# Altium PCB Solears_v3.PcbDoc
Units mm, origin at the board's own origin, x right, y up, seen from the top; angles counter-clockwise.
Board outline 51.82 x 94.11 mm, 4 copper layers (Top Layer, Layer 1, Layer 2, Bottom Layer), stack 0.603 mm thick; 55 components, 54 nets, 225 pads, 70 vias.
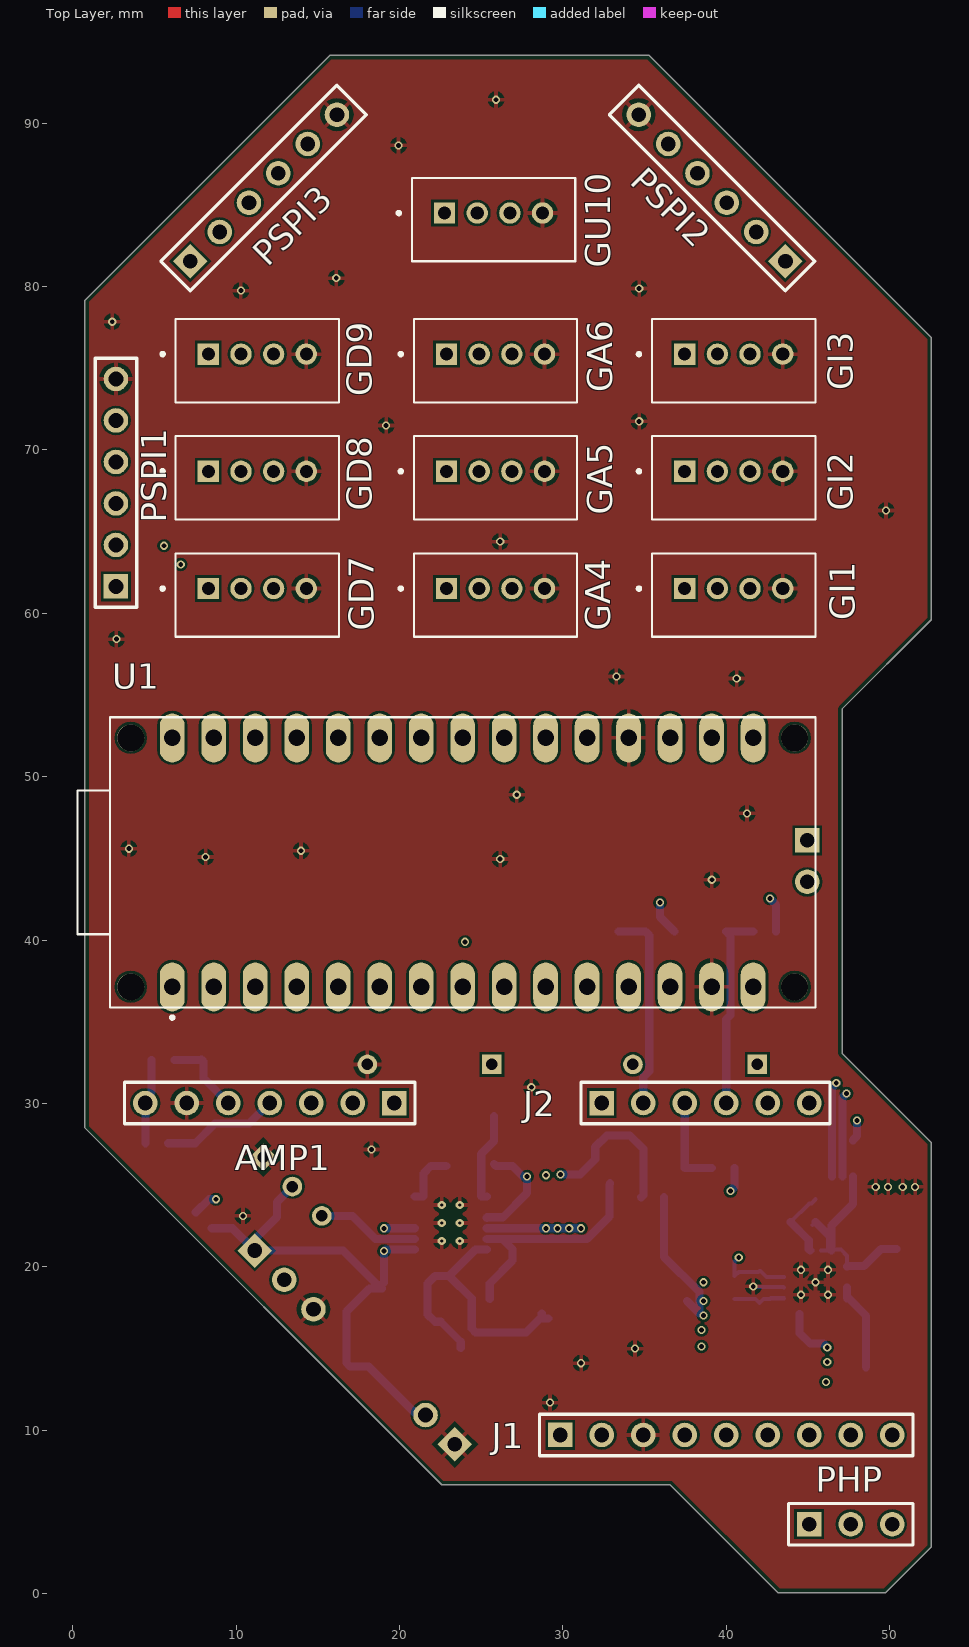
[diagram p0: Top Layer view]
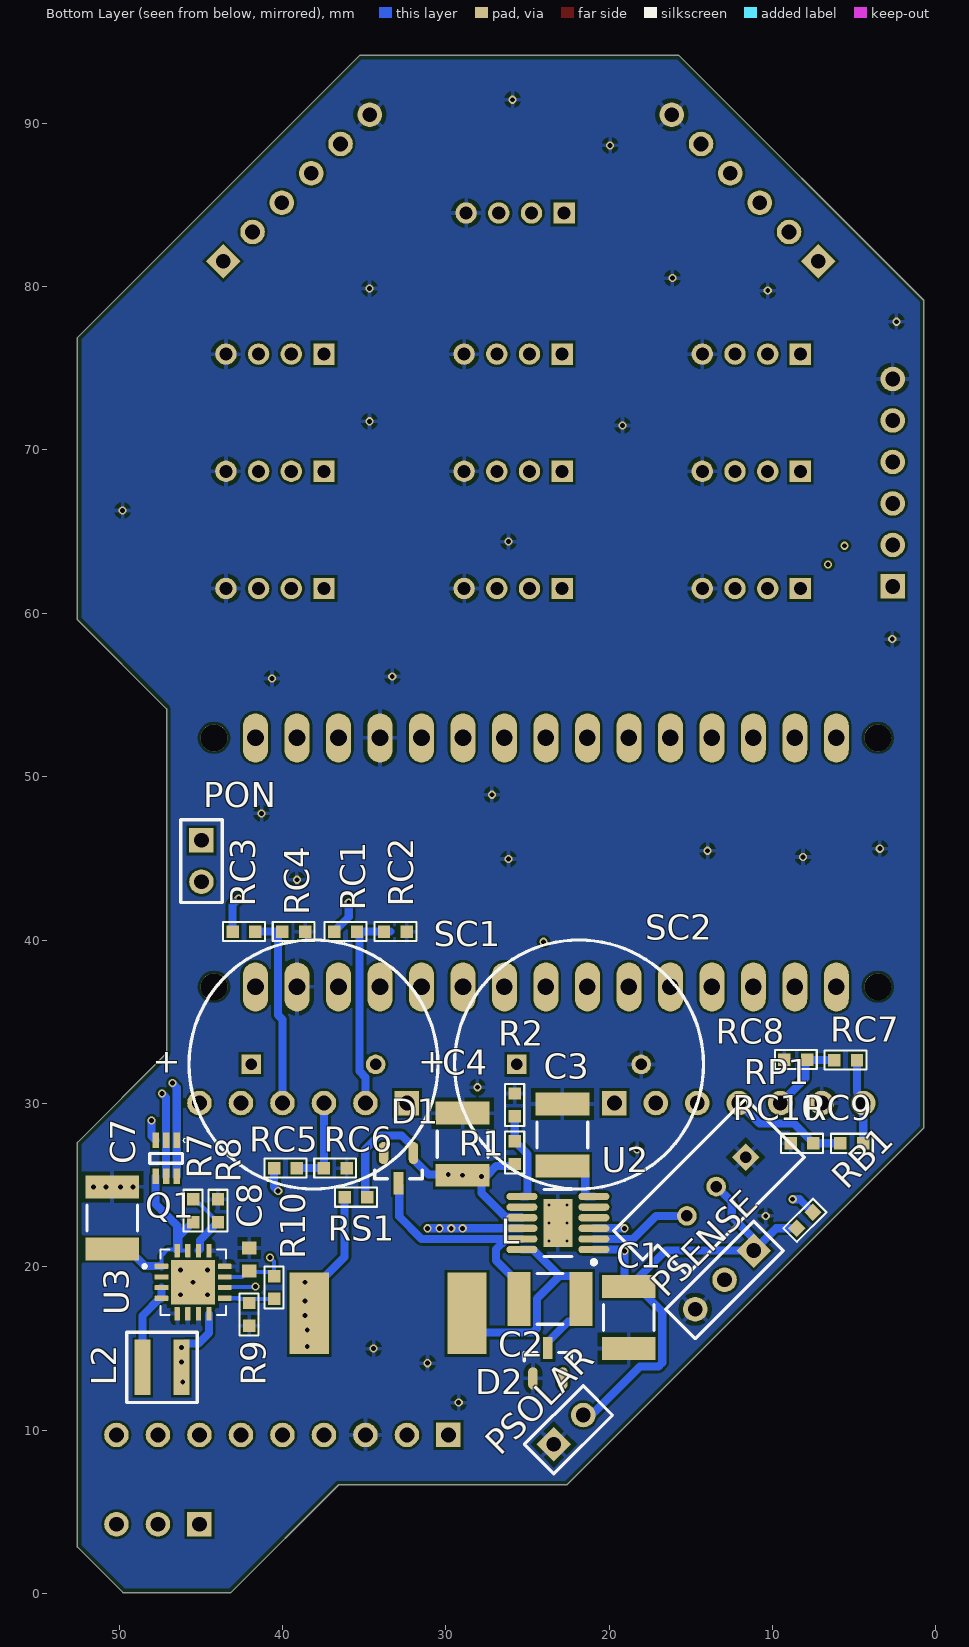
[diagram p1: Bottom Layer view, seen from below]
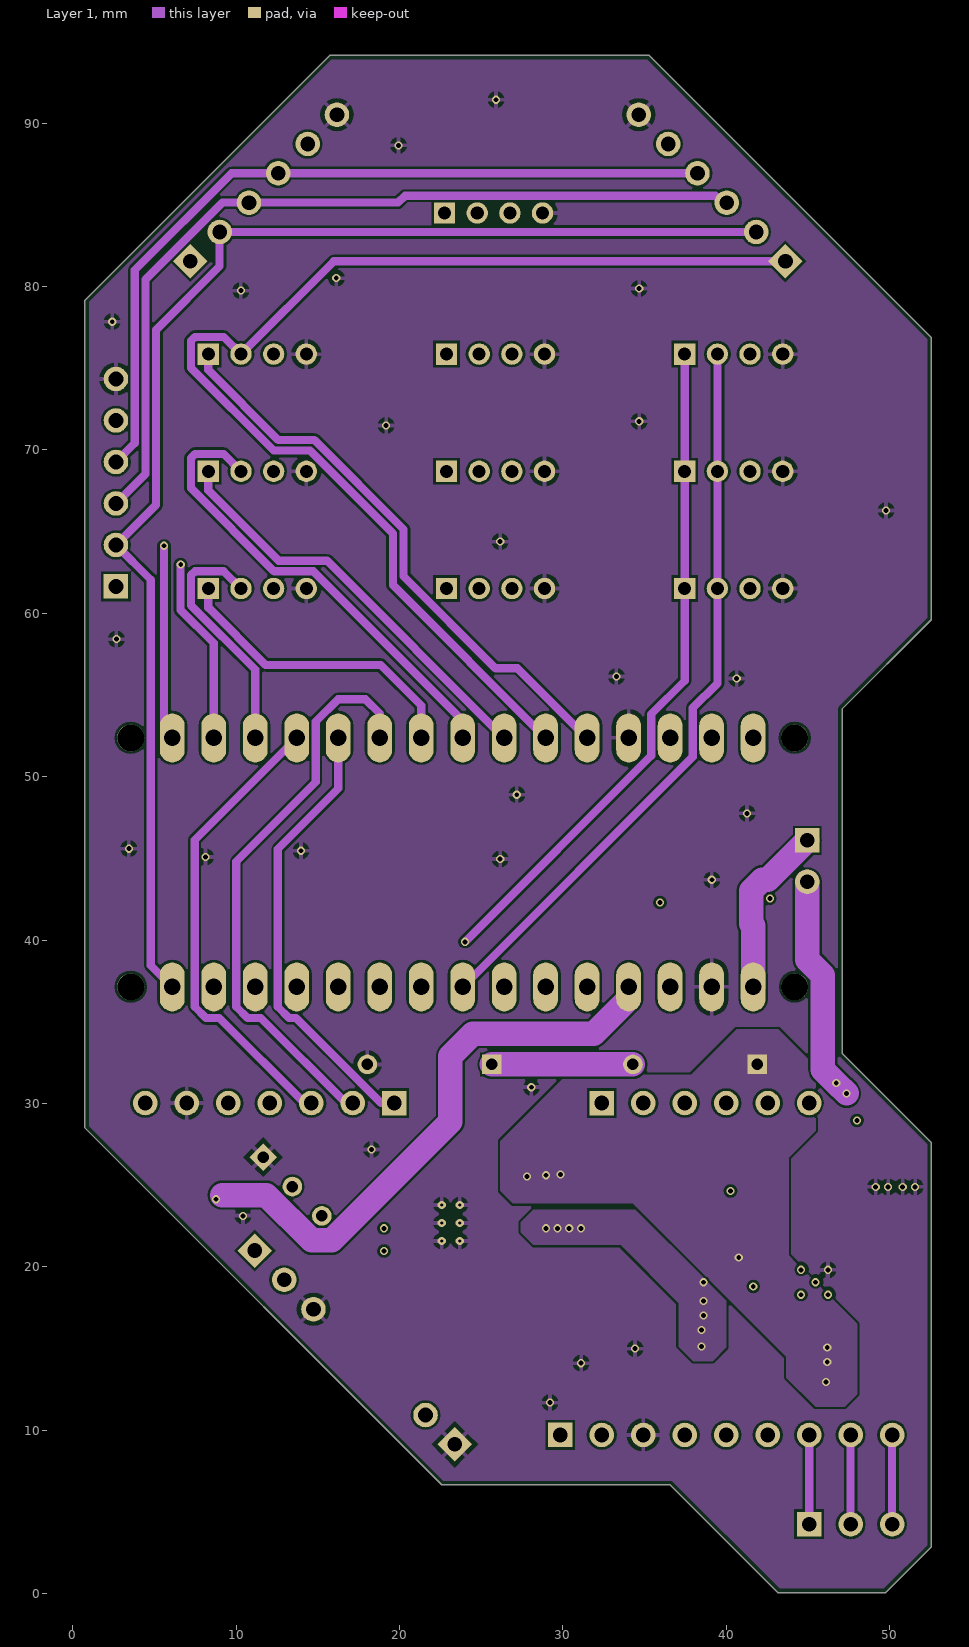
[diagram p2: Layer 1]
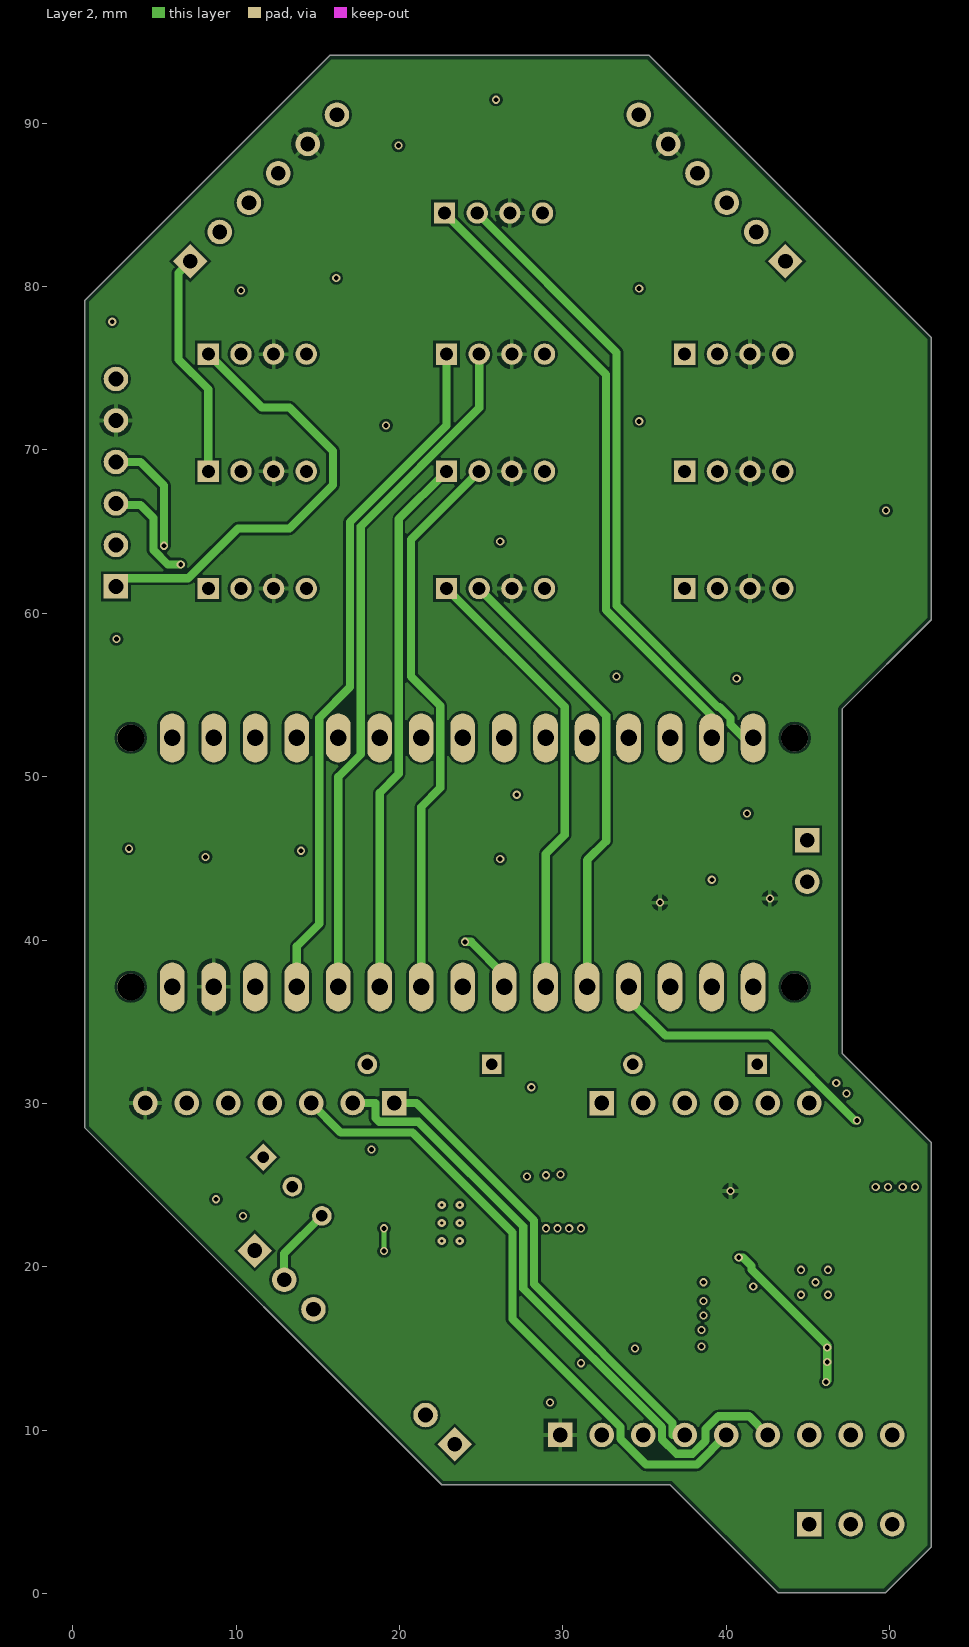
[diagram p3: Layer 2]

## Layer stack, top to bottom
Top Solder: solder mask 0.0102, Solder Resist, Dk 3.5
Top Layer: signal copper 0.0356
Dielectric 2: prepreg 0.0711, PP-006, Dk 4.1
Layer 1: signal copper 0.035
Dielectric 1: dielectric 0.32, FR-4, Dk 4.8
Layer 2: signal copper 0.035
Dielectric 3: prepreg 0.0711, PP-006, Dk 4.1
Bottom Layer: signal copper 0.0356
Bottom Solder: solder mask 0.0102, Solder Resist, Dk 3.5

## Board outline
0.737,28.498 0.737,79.171 15.723,94.157 35.281,94.157 52.553,76.885 52.553,59.613 47.092,54.152 47.092,33.07 52.553,27.609 52.553,2.844 49.759,0.05 43.155,0.05 36.551,6.654 22.581,6.654

## Design rules (kind name [scope] priority, off if disabled: settings)
BoardOutlineClearance [All] p1: gap=0.254 ignorepadtopadclearanceinfootprint=FALSE except(0: Arc-SplitContinuation Track-SplitContinuation SMDPad-SplitContinuation THPad-SplitContinuation Via-SplitContinuation Fill-SplitContinuation Poly-SplitContinuation Region-SplitContinuation Text-SplitContinuation)
Clearance [All] p1: gap=0.15 ignorepadtopadclearanceinfootprint=FALSE except(0: Arc-Hole Track-Hole SMDPad-Hole THPad-Hole Via-Hole Fill-Hole Poly-Hole Region-Hole Text-Hole)
ComponentClearance ComponentClearance_1 [InComponent('SC2')] p1: gap=0 collisioncheckmode=3 verticalgap=0 showdistances=FALSE
ComponentClearance [InComponent('SC1')] p2: gap=0 collisioncheckmode=3 verticalgap=0 showdistances=FALSE
MinimumSolderMaskSliver [All] p1: minsoldermaskwidth=0.1
PolygonConnect PolygonConnect_3 [All vs IsNamedPolygon('MIDL')] p1: connectstyle=Direct reliefconductorwidth=0.254 reliefentries=4 polygonreliefangle="90 Angle" airgapwidth=0.254
PolygonConnect PolygonConnect_2 [All vs IsNamedPolygon('MIDVCAP')] p2: connectstyle=Direct reliefconductorwidth=0.254 reliefentries=4 polygonreliefangle="90 Angle" airgapwidth=0.254
PolygonConnect PolygonConnect_1 [All vs IsNamedPolygon('MIDVCAP')] p3: connectstyle=Direct reliefconductorwidth=0.254 reliefentries=4 polygonreliefangle="90 Angle" airgapwidth=0.254
PolygonConnect [All] p4: connectstyle=Relief reliefconductorwidth=0.254 reliefentries=4 polygonreliefangle="90 Angle" airgapwidth=0.254
RoutingVias [All] p1: holewidth=0.711 width=1.27 viastyle="Through Hole" minholewidth=0.711 minwidth=1.27 maxholewidth=0.711 maxwidth=1.27
SilkToSilkClearance [All] p1: silktosilkclearance=0.1
SilkToSolderMaskClearance [IsPad] p1: minsilkscreentomaskgap=0.1 clearancetoexposedcopper=TRUE
SolderMaskExpansion [All] p1: expansion=0.102
Width [All] p1: maxlimit=1.5 minlimit=0.15 preferedwidth=0.3 toplayer_maxwidth=0.5 toplayer_prefwidth=0.254 midlayer1_minwidth=0.254 midlayer2_minwidth=0.254 midlayer2_maxwidth=0.5 bottomlayer_maxwidth=0.5 bottomlayer_prefwidth=0.254 minimp=50.000000 maximp=50.000000 favimp=50.000000
26 further rules are at their usual default settings.

## Classes and differential pairs
component class Consumer: AMP1 GA4 GA5 GA6 GD7 GD8 GD9 GI1 GI2 GI3 GU10 J1 J2 PHP PSPI1 PSPI2 PSPI3 RC1 RC2 RC3 RC4 RC5 RC6 RC7 RC8 RC9 RC10 U1
component class Harvester: C1 C2 C3 C4 C7 C8 D1 D2 L L2 PON PSENSE PSOLAR Q1 R1 R2 R7 R8 R9 R10 RB1 RP1 RS1 SC1 SC2 U2 U3

## Components (designator, comment, footprint, x,y, rotation, side; value= is the part's Value field where it differs from the comment)
AMP1 "Header 7" HDR1X7 19.677,30.022 r180 top
C1 "Cap" 1812 18.796,16.891 r270 bottom value=10uF
C2 "Cap" 1812 23.622,18.034 r180 bottom value=1uF
C3 "Cap" 1812 22.86,28.067 r90 bottom value=1uF
C4 "Cap" 1812 28.968,27.503 r90 bottom value=10uF
C7 "Cap" 1812 50.419,22.987 r270 bottom value=47uF
C8 "Cap" 1608[0603] 42.037,20.447 r270 bottom value=10uF
D1 "ZLLS500TA" FP-SOT23-IPC_B 32.893,26.035 r270 bottom
D2 "ZLLS500TA" FP-SOT23-IPC_B 23.749,14.097 r90 bottom
GA4 "110990030" SEEED_110990030 25.876,61.518 r0 top
GA5 "110990030" SEEED_110990030 25.876,68.693 r0 top
GA6 "110990030" SEEED_110990030 25.876,75.869 r0 top
GD7 "110990030" SEEED_110990030 11.294,61.518 r0 top
GD8 "110990030" SEEED_110990030 11.294,68.693 r0 top
GD9 "110990030" SEEED_110990030 11.294,75.869 r0 top
GI1 "110990030" SEEED_110990030 40.458,61.518 r0 top
GI2 "110990030" SEEED_110990030 40.458,68.693 r0 top
GI3 "110990030" SEEED_110990030 40.458,75.869 r0 top
GU10 "110990030" SEEED_110990030 25.756,84.505 r0 top
J1 "Header 9" HDR1X9 29.837,9.702 r0 top
J2 "Header 6" HDR1X6 32.377,30.022 r0 top
L "MSS1278H" MSS1278H 33.528,17.145 r270 bottom
L2 "XAL4030-682MEC" FP-XAL4030-472MEC-MFG 47.371,13.843 r0 bottom
PHP "Header 3" HDR1X3 45.077,4.241 r0 top
PON "Header 2" HDR1X2 44.958,46.101 r270 bottom
PSENSE "Header 3" HDR1X3 11.14,20.991 r315 bottom
PSOLAR "Header 2" HDR1X2 23.386,9.126 r135 bottom
PSPI1 "Header 6" HDR1X6 2.642,61.645 r90 top
PSPI2 "Header 6" HDR1X6 43.625,81.548 r135 top
PSPI3 "Header 6" HDR1X6 7.19,81.548 r45 top
Q1 "SI1403BDL" SI1403BDL 47.117,26.635 r270 bottom
R1 "Res1" 0603R-GENERIC 25.781,26.289 r90 bottom value=417K
R2 "Res1" 0603R-GENERIC 25.781,29.21 r90 bottom value=625K
R7 "Res1" 0603R-GENERIC 45.466,24.13 r270 bottom value=1.12M
R8 "Res1" 0603R-GENERIC 43.942,24.13 r270 bottom value=112K
R9 "Res1" 0603R-GENERIC 42.037,17.78 r270 bottom value=500K
R10 "Res1" 0603R-GENERIC 40.513,18.034 r90 bottom value=1.3M
RB1 "Res1" 0603R-GENERIC 7.521,23.34 r315 bottom value=0
RC1 "Res1" 0603R-GENERIC 36.83,40.513 r180 bottom value=0
RC2 "Res1" 0603R-GENERIC 33.782,40.513 r180 bottom value=0
RC3 "Res1" 0603R-GENERIC 43.053,40.513 r180 bottom value=0
RC4 "Res1" 0603R-GENERIC 40.005,40.513 r180 bottom value=0
RC5 "Res1" 0603R-GENERIC 40.513,26.035 r180 bottom value=0
RC6 "Res1" 0603R-GENERIC 37.465,26.035 r180 bottom value=0
RC7 "Res1" 0603R-GENERIC 4.826,32.648 r0 bottom value=0
RC8 "Res1" 0603R-GENERIC 7.874,32.679 r0 bottom value=0
RC9 "Res1" 0603R-GENERIC 4.445,27.559 r0 bottom value=0
RC10 "Res1" 0603R-GENERIC 7.493,27.559 r0 bottom value=0
RP1 "RPot" VR5 13.444,24.91 r315 bottom value=10K
RS1 "Res1" 0603R-GENERIC 36.195,24.257 r180 bottom value=0.22
SC1 "Cap Pol1" RB7.6-15 38.1,32.385 r0 bottom value=100pF
SC2 "Cap Pol1" RB7.6-15 21.844,32.385 r0 bottom value=100pF
U1 "ABX00053" MODULE_ABX00053 23.868,44.754 r0 top
U2 "LT3652EMSE#PBF" LT-MSE-12-EDP_M 23.134,22.677 r0 bottom
U3 "TPS61030RSARG4" QFN65P400X400X100-17N 45.466,19.05 r180 bottom

## Footprints (in the part's own frame and the unit in brackets; to place one, negate y for a bottom-side part, rotate by r counter-clockwise, add the part's x,y. Pads: shape width x height; smd on the part's side, far side on the other; paste and mask are expansions set on the pad)
0603R-GENERIC [mil] "RESISTOR 0603"
  rect 30x30 smd: 1(0,0) 2(55,0)
  silkscreen extent -23,-23 78,23, body extent -4,-15 59,15, height 19
1608[0603] [mm] "Chip Capacitor, Body 1.6x0.8mm, IPC High Density"
  rect 0.8x0.9 smd: 1(-0.7,0) 2(0.7,0)
  body extent -0.87,-0.48 0.87,0.48, height 1.3
1812 [mm] "Chip Capacitor, Body 4.5x3.2mm, IPC High Density"
  rect 1.4x3.3 smd: 1(-1.9,0) 2(1.9,0)
  silkscreen extent -0.8,-1.55 0.8,1.55, body extent -2.4,-1.7 2.4,1.7, height 1.4
FP-SOT23-IPC_B [mm]
  rect 1.359x0.587 smd paste+0 mask+0: 1(0.927,0)
  rrect100% 1.359x0.587 smd paste+0 mask+0: 2(-0.927,-0.915) 3(-0.927,0.915)
  silkscreen extent 0.13,-1.45 0.65,1.45, body extent -1.2,-1.45 1.2,1.45, height 1.1
FP-XAL4030-472MEC-MFG [mm]
  rect 0.98x3.4 smd paste+0 mask+0: 1(-1.185,0) 2(1.185,0)
  silkscreen extent -2.15,-2.15 2.15,2.15, body extent -2,-2 2,2, height 3.1
HDR1X2 [mm] "Connector; Header; 2 Position"
  rect 1.5x1.5 hole 0.9: 1(0,0)
  round 1.5 hole 0.9: 2(2.54,0)
  silkscreen extent -1.27,-1.27 3.81,1.27
HDR1X3 [mm] "Connector; Header; 3 Position"
  rect 1.5x1.5 hole 0.9: 1(0,0)
  round 1.5 hole 0.9: 2(2.54,0) 3(5.08,0)
  silkscreen extent -1.27,-1.27 6.35,1.27
HDR1X6 [mm] "Connector; Header; 6 Position"
  rect 1.5x1.5 hole 0.9: 1(0,0)
  round 1.5 hole 0.9: 2(2.54,0) 3(5.08,0) 4(7.62,0) 5(10.16,0) 6(12.7,0)
  silkscreen extent -1.27,-1.27 13.97,1.27
HDR1X7 [mm] "Connector; Header; 7 Position"
  rect 1.5x1.5 hole 0.9: 1(0,0)
  round 1.5 hole 0.9: 2(2.54,0) 3(5.08,0) 4(7.62,0) 5(10.16,0) 6(12.7,0) 7(15.24,0)
  silkscreen extent -1.27,-1.27 16.51,1.27
HDR1X9 [mm] "Connector; Header; 9 Position"
  rect 1.5x1.5 hole 0.9: 1(0,0)
  round 1.5 hole 0.9: 2(2.54,0) 3(5.08,0) 4(7.62,0) 5(10.16,0) 6(12.7,0) 7(15.24,0) 8(17.78,0) 9(20.32,0)
  silkscreen extent -1.27,-1.27 21.59,1.27
LT-MSE-12-EDP_M [mm] "SOP, 12-Leads, Body 4.1x3.1mm, Pitch 0.65mm, Thermal Pad 2.95x1.76mm, IPC Low Density"
  oval 1.9x0.45 smd: 1(-2.2,1.625) 2(-2.2,0.975) 3(-2.2,0.325) 4(-2.2,-0.325) 5(-2.2,-0.975) 6(-2.2,-1.625) 7(2.2,-1.625) 8(2.2,-0.975) 9(2.2,-0.325) 10(2.2,0.325) 11(2.2,0.975) 12(2.2,1.625)
  rect 1.76x2.95 smd: 13(0,0)
  silkscreen extent -2.32,-2.05 0.85,2.52, body extent -1.55,-2.05 1.55,2.05, height 1.1
MODULE_ABX00053 [mil]
  oval 60x118.11 hole 40: 1(-700,-300) 2(-600,-300) 3(-500,-300) 4(-400,-300) 5(-300,-300) 6(-200,-300) 7(-100,-300) 8(0,-300) 9(100,-300) 10(200,-300) 11(300,-300) 12(400,-300) 13(500,-300) 14(600,-300) 15(700,-300) 16(700,300) 17(600,300) 18(500,300) 19(400,300) 20(300,300) 21(200,300) 22(100,300) 23(0,300) 24(-100,300) 25(-200,300) 26(-300,300) 27(-400,300) 28(-500,300) 29(-600,300) 30(-700,300)
  round 64.96 hole 64.96 unplated: ""(-800,-300) ""(-800,300) ""(800,-300) ""(800,300)
  silkscreen extent -929,-378 850,350, body extent -905,-350 850,350, height 315
MSS1278H [mm]
  rect 5x2.4 smd: 1(0,4.826) 2(0,-4.826)
QFN65P400X400X100-17N [mm]
  rrect25% 0.84x0.32 smd: 1(-1.935,0.975) 2(-1.935,0.325) 3(-1.935,-0.325) 4(-1.935,-0.975) 9(1.935,-0.975) 10(1.935,-0.325) 11(1.935,0.325) 12(1.935,0.975)
  rrect25% 0.32x0.84 smd: 5(-0.975,-1.935) 6(-0.325,-1.935) 7(0.325,-1.935) 8(0.975,-1.935) 13(0.975,1.935) 14(0.325,1.935) 15(-0.325,1.935) 16(-0.975,1.935)
  rect 2.7x2.7 smd paste-2: 17(0,0)
  silkscreen extent -3.08,-2 2,2, body extent -2,-2 2,2, height 1
RB7.6-15 [mm] "Polarized Capacitor (Radial); 2 Leads"
  rect 1.2x1.2 hole 0.7: 1(3.81,0)
  round 1.2 hole 0.7: 2(-3.81,0)
  silkscreen extent -7.62,-7.62 7.62,7.62
SEEED_110990030 [mm]
  rect 1.308x1.308 hole 0.8: 1(-3,0)
  round 1.308 hole 0.8: 2(-1,0) 3(1,0) 4(3,0)
  silkscreen extent -5.9,-2.95 5,2.15
SI1403BDL [mm]
  rect 0.95x0.4 smd: 1(-1.1,0.65) 2(-1.1,0) 3(-1.1,-0.65) 4(1.1,-0.65) 5(1.1,0) 6(1.1,0.65)
  silkscreen extent -1.24,-1 0.3,1.34
VR5 [mm] "Thru-Hole; 3 Leads"
  rect 1.2x1.2 hole 0.7: 1(-2.54,0)
  round 1.2 hole 0.7: 2(0,0) 3(2.54,0)
  silkscreen extent -5.08,-2.54 6.35,2.54

## Part data
AMP1: "Header, 7-Pin", LatestRevisionDate=17-Jul-2002, LatestRevisionNote="Re-released for DXP Platform.", Publisher="Altium Limited"
C1 C2 C3 C4 C7 C8: "Capacitor", LatestRevisionDate=17-Jul-2002, LatestRevisionNote="Re-released for DXP Platform.", PackageDescription="Radial Cap, Thru-Hole; 2 Leads; 0.3 in Pin Spacing", PackageReference=RAD-0.3, Published=8-Jun-2000, Publisher="Altium Limited"
D1 D2: library part CMP-12790-000060-1, "DIODE SCHOTTKY 40V 700MA SOT23-3", Average Rectified Current=700mA, Capacitance=16pF, Case/Package=SOT-23, Forward Voltage=800mV, Max Forward Surge Current (Ifsm)=3.2A, Max Operating Temperature=150°C, Max Repetitive Reverse Voltage (Vrrm)=40V, Min Operating Temperature=-55°C, Package Quantity=3000, Peak Non-Repetitive Surge Current=13A, Peak Reverse Current=10uA, Power Dissipation=500mW, Current Rating=700mA, Element Configuration=Single, Forward Current=700mA, Height=1mm, Lead Free="Lead Free", Length=3.05mm, Max Reverse Voltage (DC)=40V, Mount="Surface Mount", Number of Pins=3, Output Current=700mA, Packaging="Tape and Reel", Polarity=Standard, Radiation Hardening=No, Reverse Recovery Time=3ns, Termination=SMD/SMT, Voltage Rating (DC)=40V, Weight=0.000282oz, Width=1.4mm
GA4 GA5 GA6 GD7 GD8 GD9 GI1 GI2 GI3 GU10: "GROVE 2MM 4PIN VERT CONN 10PCS", Package=None, Arrow_Electronics-Purchase-URL=https://snapeda.com/shop?store=Arrow+Electronics&id=583576, Availability=Good, MF="Seeed Technology", Mouser-Purchase-URL=https://snapeda.com/shop?store=Mouser&id=583576, MP=110990030, Price=None, SnapEDA_Link=https://www.snapeda.com/parts/110990030/Seeed%20Technology%20Co.,%20Ltd/view-part/583576/?ref=snap
J1: "Header, 9-Pin", LatestRevisionDate=17-Jul-2002, LatestRevisionNote="Re-released for DXP Platform.", Publisher="Altium Limited"
J2 PSPI1 PSPI2 PSPI3: "Header, 6-Pin", LatestRevisionDate=17-Jul-2002, LatestRevisionNote="Re-released for DXP Platform.", Publisher="Altium Limited"
L2: library part CMP-11268-000082-1, "Power Inductor (SMD), 6.8 µH, 5.1 A, Shielded, 4.5 A, XAL40xx Series, 4mm x 4mm x 3.1mm", Case/Package=SMD/SMT, DC Resistance (DCR)=44.1mR, Inductance=4.7uH, Inductance Tolerance=20%, Max DC Current=5.1A, Max Operating Temperature=125°C, Min Operating Temperature=-40°C, Package Quantity=500, Saturation Current=4.5A, Self Resonant Frequency=36MHz, Test Frequency=100kHz, Core Material=Composite, Height=3.1mm, Lead Free="Contains Lead", Length=4.3mm, Mount="Surface Mount", Packaging="Tape and Reel", REACH SVHC="No SVHC", RMS Current (Irms)=5.1A, RoHS Compliant=Yes, Series=XAL4030, Shielding=Shielded, Termination=SMD/SMT, Tolerance=20%, Width=4.3mm
PHP PSENSE: "Header, 3-Pin", LatestRevisionDate=17-Jul-2002, LatestRevisionNote="Re-released for DXP Platform.", Publisher="Altium Limited"
PON PSOLAR: "Header, 2-Pin", LatestRevisionDate=17-Jul-2002, LatestRevisionNote="Re-released for DXP Platform.", Publisher="Altium Limited"
Q1: "RC (Pi) EMI Filter 2nd Order Low Pass 2 Channel R = 33Ohms, C = 47pF 6-TSSOP, SC-88, SOT-363", Package="SOT-363 STMicroelectronics", Availability=Unavailable, MF=STMicroelectronics, MP=USBUF01W6, Price=None, SnapEDA_Link=https://www.snapeda.com/parts/USBUF01W6/STMicroelectronics/view-part/274456/?ref=snap
R1 R2 R7 R8 R9 R10 RB1 RC1 RC2 RC3 RC4 RC5 RC6 RC7 RC8 RC9 RC10 RS1: "Resistor", LatestRevisionDate=17-Jul-2002, LatestRevisionNote="Re-released for DXP Platform.", PackageDescription="Axial Device, Thru-Hole; 2 Leads; 0.3 in Pin Spacing", PackageReference=AXIAL-0.3, Published=8-Jun-2000, Publisher="Altium Limited"
RP1: "Potentiometer", LatestRevisionDate=17-Jul-2002, LatestRevisionNote="Re-released for DXP Platform.", PackageDescription="Variable Resistor, Thru-Hole; 3 Leads", PackageReference=VR5, Published=8-Jun-2000, Publisher="Altium Limited", Set Position=0.5, Sim Note="Enter the Resistance value and the set point into parameter fields."
SC1 SC2: "Polarized Capacitor (Radial)", LatestRevisionDate=17-Jul-2002, LatestRevisionNote="Re-released for DXP Platform.", PackageDescription="Polarized Capacitor (Radial); 2 Leads", PackageReference=RB7.6-15, Published=8-Jun-2000, Publisher="Altium Limited"
U1: "ARDUINO NANO RP2040 CONNECT WITH", Package=None, Availability="In Stock", Check_prices=https://www.snapeda.com/parts/ABX00053/Arduino/view-part/6098734/?ref=eda, MF=Arduino, MP=ABX00053, Price=None, SnapEDA_Link=https://www.snapeda.com/parts/ABX00053/Arduino/view-part/6098734/?ref=snap
U2: library part CMP-0473-00138-1, "Power Tracking 2 A Battery Charger for Solar Power, 12-pin SOP (MSE-12-EDP), -40 to 125 degC, Pb-Free", Manufacturer="Linear Technology", ComponentLink1Description="Manufacturer URL", ComponentLink1URL=http://www.linear.com/, ComponentLink2Description=Datasheet, ComponentLink2URL=http://cds.linear.com/docs/en/datasheet/3652fd.pdf, ComponentLink3Description="Package Specification", ComponentLink3URL=http://cds.linear.com/docs/en/packaging/05081666_G_MSE12.pdf, DatasheetVersion="Rev. D", Energy Source=Solar, Mounting Technology="Surface Mount", Number of Outputs=1, PackageDescription="12-Pin Plastic MSOP, Exposed Die Pad, Body 4.039 x 3 mm, Pitch 0.65 mm", PackageReference=MSE-12-EDP, PackageVersion="Rev. G, 05/2013", PartNumber=LT3652EMSE#PBF, RoHS=TRUE, Topology="Battery Charger", Vin Max(V)=32, Vin Min(V)=4.95

## Via types
v1: diameter 0.5, hole 0.3, Top Layer to Bottom Layer, tented both sides, 64 vias
v2: diameter 0.5, hole 0.2, Top Layer to Bottom Layer, 6 vias

## Nets (pads, with @x,y where several pads share a name; then routed paths per layer and width w, separated by ;. In a path a pad name is that pad's centre, name@x,y a point inside that pad or via, vN(x,y) a via of type N, cw(c..) or ccw(c..) an arc to the next point about the centre after c; other vN are vias at no path point)
3V3: AMP1.7 GA4.3 GA5.3 GA6.3 GD7.3 GD8.3 GD9.3 GI1.3 GI2.3 GI3.3 GU10.3 J1.1 PSPI1.5 PSPI2.5 PSPI3.5 RC1.1 RC3.1 RC5.1 RC7.1 RC9.1 U1.2 | length 11.1
  Bottom Layer w0.5: RC9.1 4.441,27.563 4.441,30.018 AMP1.7 4.437,30.293 4.826,30.682 RC7.1 ; v1(35.941,42.291) 35.941,41.402 RC1.1 ; v1(40.259,24.638) 40.513,24.892 RC5.1 ; v1(42.672,42.545) 43.053,42.164 RC3.1
5V: Q1.3 RB1.1 U1.12 | length 55.9
  Layer 1 w1.5: 9.144,24.384 11.849,24.384 14.619,21.614 15.861,21.614 23.114,28.867 23.114,32.893 24.491,34.27 31.895,34.27 34.028,36.402 U1.12
  Layer 2 w0.5: U1.12 34.028,36.396 36.277,34.147 42.676,34.147 47.867,28.956 v1(48.006,28.956)
  Bottom Layer w0.5: RB1.1 7.54,23.34 8.33,24.13 v1(8.763,24.13) ; Q1.3 47.767,27.765 48.006,28.004 v1(48.006,28.956)
A0: GA6.1 U1.4 | length 42.5
  Layer 2 w0.5: U1.4 13.708,39.616 15.086,40.994 15.086,53.593 16.976,55.483 16.976,65.586 22.876,71.486 GA6.1
A1: GA6.2 U1.5 | length 42.3
  Layer 2 w0.5: U1.5 16.248,49.993 17.626,51.371 17.626,65.317 24.876,72.567 GA6.2
A2: GA5.1 U1.6 | length 33.3
  Layer 2 w0.5: U1.6 18.788,49.014 19.95,50.176 19.95,65.767 GA5.1
A3: GA5.2 U1.7 | length 34.5
  Layer 2 w0.5: U1.7 21.328,48.14 22.49,49.302 22.49,54.345 20.701,56.134 20.701,64.519 GA5.2
A6: GA4.1 U1.10 | length 27.9
  Layer 2 w0.5: GA4.1 30.11,54.284 30.11,46.429 28.948,45.267 U1.10
A7: GA4.2 U1.11 | length 28.1
  Layer 2 w0.5: GA4.2 32.65,53.744 32.65,46.049 31.488,44.887 U1.11
AGND: J1.8 PHP.2 | length 5.5
  Layer 1 w0.5: PHP.2 J1.8
AREF: U1.3
BCLK: AMP1.2 J1.6 U1.25 | length 74.7
  Layer 1 w0.5: AMP1.2 16.714,30.022 11.502,35.234 10.686,35.234 10.006,35.915 10.006,44.804 14.87,49.668 14.87,53.377 16.229,54.737 17.907,54.737 18.788,53.856 U1.25
  Layer 2 w0.5: AMP1.2 18.527,30.022 18.527,29.106 18.761,28.872 21.166,28.872 27.574,22.464 27.574,18.671 36.067,10.178 36.067,9.433 36.947,8.552 37.933,8.552 38.727,9.346 38.727,10.058 39.52,10.852 41.387,10.852 J1.6
CHRG: U2.4
CIPO: PSPI1.4 PSPI2.4 PSPI3.4 U1.30 | length 68.3
  Layer 1 w0.5: PSPI1.4 3.792,70.415 3.792,81.008 9.72,86.936 PSPI3.4 PSPI2.4 ; v1(5.588,64.135) 5.588,52.874 U1.30
  Layer 2 w0.5: PSPI1.4@2.642,69.264 4.142,69.264 5.588,67.818 v1(5.588,64.135)
COPI: PSPI1.3 PSPI2.3 PSPI3.3 U1.29 | length 70.6
  Layer 1 w0.5: PSPI1.3 2.642,66.996 2.912,66.996 4.442,68.525 4.442,80.426 9.156,85.14 PSPI3.3 19.913,85.14 20.332,85.559 39.343,85.559 39.762,85.14 PSPI2.3 ; v1(6.604,62.992) 6.59,62.978 6.59,60.212 8.628,58.174 U1.29
  Layer 2 w0.5: PSPI1.3 2.727,66.639 4.142,66.639 4.938,65.843 4.938,63.866 5.812,62.992 v1(6.604,62.992)
D2: GD9.1 PSPI1.1 U1.20 | length 63.2
  Layer 1 w0.5: GD9.1 8.294,74.891 12.571,70.614 14.784,70.614 20.25,65.147 20.25,62.27 25.886,56.634 27.227,56.634 U1.20
  Layer 2 w0.5: PSPI1.1 3.142,62.145 7.047,62.145 10.103,65.201 13.258,65.201 15.922,67.865 15.922,69.93 13.258,72.594 11.569,72.594 GD9.1
D3: GD9.2 PSPI2.1 U1.21 | length 73.9
  Layer 1 w0.5: U1.21 19.6,61.721 19.6,64.878 14.515,69.964 12.302,69.964 7.24,75.026 7.24,76.689 7.474,76.923 9.24,76.923 GD9.2 15.973,81.548 PSPI2.1
D4: GD8.1 PSPI3.1 U1.22 | length 39.5
  Layer 1 w0.5: GD8.1 8.294,67.525 12.597,63.222 15.56,63.222 U1.22
  Layer 2 w0.5: PSPI3.1 6.477,80.835 6.477,75.532 8.294,73.715 GD8.1
D5: GD8.2 U1.23 | length 29
  Layer 1 w0.5: GD8.2 9.24,69.748 7.474,69.748 7.24,69.513 7.24,67.66 12.328,62.572 14.731,62.572 23.672,53.631 23.672,52.57 U1.23
D6: GD7.1 U1.24 | length 18.7
  Layer 1 w0.5: GD7.1 8.294,60.346 11.799,56.842 18.85,56.842 21.328,54.364 U1.24
D10: GD7.2 U1.28 | length 15.2
  Layer 1 w0.5: GD7.2 9.24,62.572 7.474,62.572 7.24,62.338 7.24,60.481 11.168,56.554 U1.28
DOUT: AMP1.3 J1.5 U1.27 | length 67.5
  Layer 1 w0.5: U1.27 7.466,46.132 7.466,35.915 8.146,35.234 8.962,35.234 14.174,30.022 AMP1.3
  Layer 2 w0.5: AMP1.3 16.397,28.222 20.8,28.222 26.924,22.098 26.924,16.794 33.527,10.192 33.527,9.466 35.09,7.902 38.202,7.902 39.997,9.696 J1.5
FAULT: U2.5
GAIN: AMP1.4 RC9.2 RC10.1 | length 7.2
  Bottom Layer w0.5: RC9.2 RC10.1 8.694,28.76 10.795,28.76 AMP1.4
GND: AMP1.6 C1.2 C3.2 C4.2 C7.1 C8.1 D2.3 GA4.4 GA5.4 GA6.4 GD7.4 GD8.4 GD9.4 GI1.4 GI2.4 GI3.4 GU10.4 J1.3 PSENSE.3 PSOLAR.1 PSPI1.6 PSPI2.6 PSPI3.6 R2.2 R8.1 R9.2 RC2.2 RC4.2 RC6.2 RC8.2 RC10.2 RP1.1 SC2.2 U1.14 U1.19 U2.13 U3.5 U3.6 U3.7 U3.10 U3.12 U3.13 U3.17 | length 1.9
  Bottom Layer w0.254: v1(41.656,18.796) 41.694,18.758 43.498,18.758 U3.10
  other v1: 29.21,11.684 31.115,14.097 34.417,14.986 44.577,18.288 46.228,18.288 45.466,19.05 44.577,19.812 46.228,19.812 10.414,23.114 49.149,24.892 49.911,24.892 50.8,24.892 51.562,24.892 18.288,27.178 28.067,30.988 39.116,43.688 26.162,44.958 8.128,45.085 13.97,45.466 3.429,45.593 41.275,47.752 27.178,48.895 40.64,56.007 33.274,56.134 2.667,58.42 26.162,64.389 49.784,66.294 19.177,71.501 34.671,71.755 2.413,77.851 10.287,79.756 34.671,79.883 16.129,80.518 19.939,88.646 25.908,91.44
  other v2: 22.584,21.577 23.684,21.577 22.584,22.677 23.684,22.677 22.584,23.777 23.684,23.777
LOUT: J1.7 PHP.1 | length 5.5
  Layer 1 w0.5: PHP.1 J1.7
MUTE: J2.3 RC5.2 RC6.1 | length 5.6
  Bottom Layer w0.5: J2.3 37.461,30.018 37.461,26.039 RC6.1 RC5.2
NetC2_1: C2.1 D1.1 U2.11 | length 14.6
  Bottom Layer w0.5: U2.11 31.481,21.702 32.85,23.071 32.85,25.004 32.893,25.047 D1.1 ; C2.1 25.522,18.984 26.924,20.386 26.924,21.071 26.318,21.677
NetC2_2: C2.2 D2.1 L.1 U2.12 | length 18.7
  Bottom Layer w0.5: D2.1 23.749,15.41 22.525,16.634 22.172,16.634 21.722,17.084 C2.2 21.722,18.984 22.172,19.434 23.041,19.434 ; U2.12 24.659,21.052 23.041,19.434 ; L.1 28.702,16.934 L.1@28.608,16.84 ; L.1@29.103,16.84 L.1@28.608,16.84 ; 23.041,19.434 24.422,18.053 24.422,16.218 24.656,15.984 27.752,15.984 L.1@28.608,16.84
NetC3_1: C3.1 U2.6 | length 3.5
  Bottom Layer w0.5: U2.6 21.435,24.302 21.46,24.327 21.46,25.717 21.91,26.167 C3.1
NetL2_2: L2.2 U3.3 U3.4 | length 5.4
  Bottom Layer w0.5: U3.3 U3.4 47.481,18.075 48.556,17 L2.2
NetL_2: L.2 RS1.1 U2.10 | length 14.9
  Bottom Layer w0.5: U2.10 v1(31.115,22.352) ; RS1.1 36.195,20.604 38.354,18.445 L.2 L.2@37.592,17.907
  other v1: 38.481,15.113 38.481,16.129 38.608,17.018 38.608,17.907 38.608,19.05 28.965,22.352 29.662,22.352 30.385,22.352
NetPSENSE_2: PSENSE.2 RP1.3 U2.2 | length 11.2
  Layer 2 w0.5: PSENSE.2 12.936,20.81 RP1.3
  Bottom Layer w0.5: RP1.3 17.126,23.114 18.538,21.702 U2.2
NetR1_2: R1.2 R2.1 U2.7 | length 5.6
  Bottom Layer w0.5: U2.7 25.025,24.302 25,24.327 25,26.905 R1.2 R2.1
NetR7_1: R7.1 R8.2 U3.14 | length 4.3
  Bottom Layer w0.254: R8.2 45.085,23.876 45.212,23.876 R7.1
  Bottom Layer w0.5: R8.2 45.051,21.624 45.051,21.075 U3.14
NetR9_1: R9.1 R10.1 U3.9 | length 3.2
  Bottom Layer w0.254: R10.1 41.783,18.034 R9.1 42.291,18.034 42.689,18.034 42.73,18.075 U3.9
NetSC1_2: SC1.2 SC2.1 | length 8.6
  Layer 1 w1.5: SC2.1 SC1.2
NTC: U2.8
QSPIR: U1.13
ROUT: J1.9 PHP.3 | length 5.5
  Layer 1 w0.5: PHP.3 J1.9
RST: U1.18
RX: GU10.1 U1.17 | length 38.9
  Layer 2 w0.5: GU10.1 32.639,74.622 32.639,60.198 39.108,53.729 U1.17
SCK: PSPI1.2 PSPI2.2 PSPI3.2 U1.1 | length 83.1
  Layer 1 w0.5: U1.1 4.773,38.449 4.773,62.054 PSPI1.2 5.092,66.635 5.092,77.355 8.986,81.249 PSPI3.2 PSPI2.2
SCL: GI1.1 GI2.1 GI3.1 U1.9 | length 45.5
  Layer 1 w0.5: v1(24.016,39.891) 35.406,51.281 35.406,53.821 37.458,55.873 GI1.1 GI2.1 GI3.1
  Layer 2 w0.5: v1(24.016,39.891) 24.388,39.891 26.408,37.872 U1.9
SD: AMP1.5 RC7.2 RC8.1 | length 5
  Bottom Layer w0.5: RC7.2 6.239,32.663 7.858,32.663 RC8.1 7.99,32.563 7.99,31.548 AMP1.5
SDA: GI1.2 GI2.2 GI3.2 U1.8 | length 45.2
  Layer 1 w0.5: U1.8 37.946,51.212 37.946,54.202 39.458,55.714 GI1.2 GI2.2 GI3.2
SF1: J2.2 RC1.2 RC2.1 | length 12.4
  Bottom Layer w0.5: RC2.1@33.401,40.513 35.052,40.513 35.29,40.275 35.29,31.971 34.917,31.597 J2.2
SF2: J2.4 RC3.2 RC4.1 | length 12.4
  Bottom Layer w0.5: J2.4 39.997,35.134 40.27,35.407 40.27,40.248 RC4.1 RC3.2
TX: GU10.2 U1.16 | length 39.5
  Layer 2 w0.5: GU10.2 33.289,75.972 33.289,60.467 39.482,54.274 39.589,54.274 40.27,53.593 40.27,53.202 41.098,52.374 U1.16
VBOOST: C7.2 Q1.4 R7.2 U3.1 U3.15 U3.16 | length 13.4
  Bottom Layer w0.254: R7.2@45.298,22.565 R7.2 ; U3.15 U3.16 ; U3.16@46.441,21.049 47.023,21.049 47.401,20.671 U3.1
  Bottom Layer w0.5: R7.2 46.351,21.848 46.351,21.075 U3.16 46.441,21.049 46.441,22.524 47.767,23.85 Q1.4 ; U3.1 47.416,20.04 48.422,20.04 49.469,21.087 C7.2
VCAP: C4.1 C8.2 D1.3 L2.1 R1.1 R10.2 RS1.2 SC1.1 U2.9 U3.8 U3.11 | length 34.2
  Layer 2 w0.5: v1(40.767,20.574) 41.021,20.574 41.552,20.043 41.552,19.82 46.186,15.185 v1(46.186,15.053) v1(46.186,14.16) 46.186,13.039 v1(46.101,12.954)
  Bottom Layer w0.254: v1(40.767,20.574) 40.513,20.32 R10.2 40.767,19.685 41.975,19.685 C8.2 42.087,19.747 42.459,19.375 U3.11
  Bottom Layer w0.5: U2.9 25.359,23.027 26.318,23.027 27.813,24.522 v1(27.813,25.527) 27.543,25.527 26.912,26.158 25.912,26.158 R1.1 ; v1(29.845,25.654) 31.056,25.654 31.978,26.576 D1.3 31.978,27.324 32.695,28.041 34.095,28.041 34.925,27.211 34.925,24.384 RS1.2 ; U3.8 44.491,15.945 45.143,15.293 45.946,15.293 v1(46.186,15.053)
  other v1: 28.968,25.603
VIN: PON.1 U1.15 | length 10.7
  Layer 1 w1.5: U1.15 41.643,37.139 41.643,40.883 41.522,41.004 41.522,43.021 42.196,43.695 42.552,43.695 PON.1
VOUT: PON.2 Q1.1 Q1.2 Q1.5 Q1.6 | length 24.9
  Layer 1 w1.5: PON.2 44.958,38.803 45.913,37.849 45.913,32.065 v1(46.736,31.242) v1(47.371,30.607)
  Bottom Layer w0.5: Q1.6 Q1.1 46.467,30.973 v1(46.736,31.242) ; Q1.5 Q1.2 47.117,30.353 v1(47.371,30.607)
VSOLAR: C1.1 PSENSE.1 PSOLAR.2 RB1.2 RP1.2 U2.1 U2.3 | length 36.6
  Layer 2 w0.3: v1(19.05,20.955) 19.05,21.067 19.058,21.075 19.058,22.344 v1(19.05,22.352)
  Bottom Layer w0.254: v1@19.05,21.082 19.08,21.052 v1@19.147,21.052
  Bottom Layer w0.5: RB1.2 9.779,22.352 PSENSE.1 ; RP1.2 12.489,23.955 12.489,23.048 11.14,21.698 PSENSE.1 ; v1(19.05,22.352) U2.3 ; U2.1 19.147,21.052 v1(19.05,20.955) 19.05,19.045 C1.1 18.923,18.664 C1.1@18.862,18.664 ; PSOLAR.2 21.082,10.922 18.113,13.891 16.98,13.891 16.746,14.125 16.746,17.254 18.156,18.664 C1.1@18.862,18.664 ; PSENSE.1 16.535,20.991 C1.1@18.862,18.664
WSEL: AMP1.1 J1.4 U1.26 | length 56.5
  Layer 1 w0.5: U1.26 16.248,49.268 12.546,45.566 12.546,35.915 13.226,35.234 13.661,35.234 18.873,30.022 AMP1.1
  Layer 2 w0.5: AMP1.1 21.032,30.022 28.224,22.83 28.224,18.94 36.717,10.448 36.717,9.702 J1.4
pads on no net: D1.2 D2.2 J1.2 J2.1 J2.5 J2.6 U1. U3.2

## Polygon pours and split planes (outlines as drawn)
GND on Layer 1 "MIDGND" (solid, pour order 13): 0,0 0,96.266 57.023,96.266 57.15,96.139 57.15,0
VCAP on Layer 1 "MIDVCAP" (solid, pour order 11): 43.752,13.144 43.688,13.208 43.688,14.478 34.29,23.876 33.02,23.876 31.75,23.876 26.924,23.876 26.162,24.638 26.162,27.686 30.226,31.75 37.846,31.75 40.64,34.544 43.18,34.544 45.466,32.258 45.466,28.321 43.815,26.67 43.815,20.701 48.006,16.51 48.006,12.192 47.244,11.43 45.466,11.43
NetL_2 on Layer 1 "MIDL" (solid, pour order 12): 28.194,23.495 35.052,23.495 40.005,18.542 40.005,15.061 39.168,14.224 37.973,14.224 37.084,15.113 37.084,17.78 33.528,21.336 28.194,21.336 27.432,22.098 27.432,22.733
GND on Top Layer "TOPGND" (solid, pour order 4): 0,95.885 0,0 54.991,0 54.991,95.885
3V3 on Layer 2 "3V3" (solid, pour order 10): 0,0 54.737,0 54.737,95.758 0,95.758
GND on Bottom Layer "BOTGND" (solid, pour order 6): 54.991,95.757 54.991,0 0,0 0,95.757

## Silkscreen, mask and mechanical layers (free items; w line width, h text height)
Outline:
  lines w0.1: 0.737,28.498 0.737,56.438 0.737,79.171 15.723,94.157 35.281,94.157 52.553,76.885 52.553,59.613 47.092,54.152 47.092,33.07 52.553,27.609 52.553,2.844 49.759,0.05 43.155,0.05 36.551,6.654 22.581,6.654 0.737,28.498

## Text inside footprints (layer, text, board x,y; h text height)
SC1: Bottom Overlay "+" at 46.232,33.122 h1.5 r180
SC2: Bottom Overlay "+" at 29.976,33.122 h1.5 r180